# EAGLE board Segmentcontur (EAGLE 5.06)
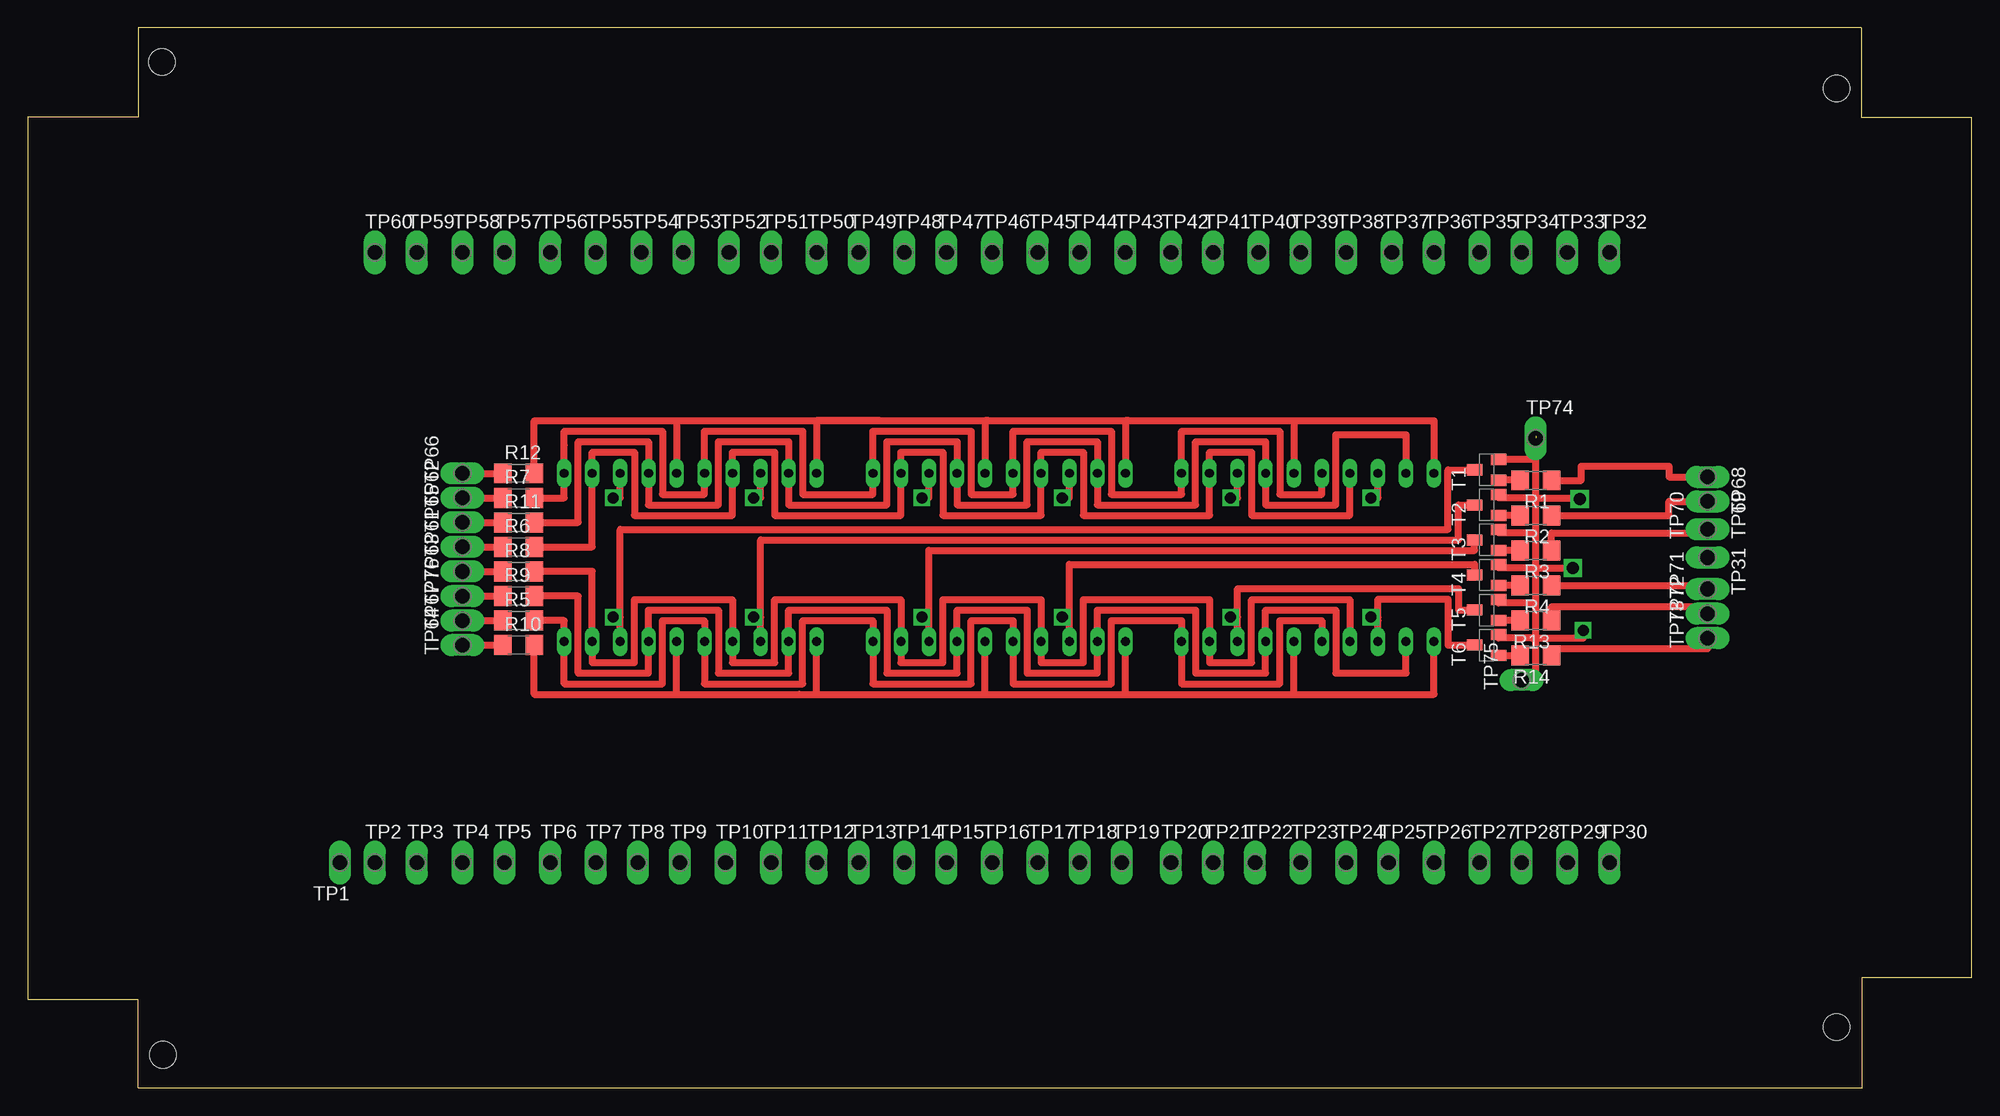
[diagram p0: board, top side]
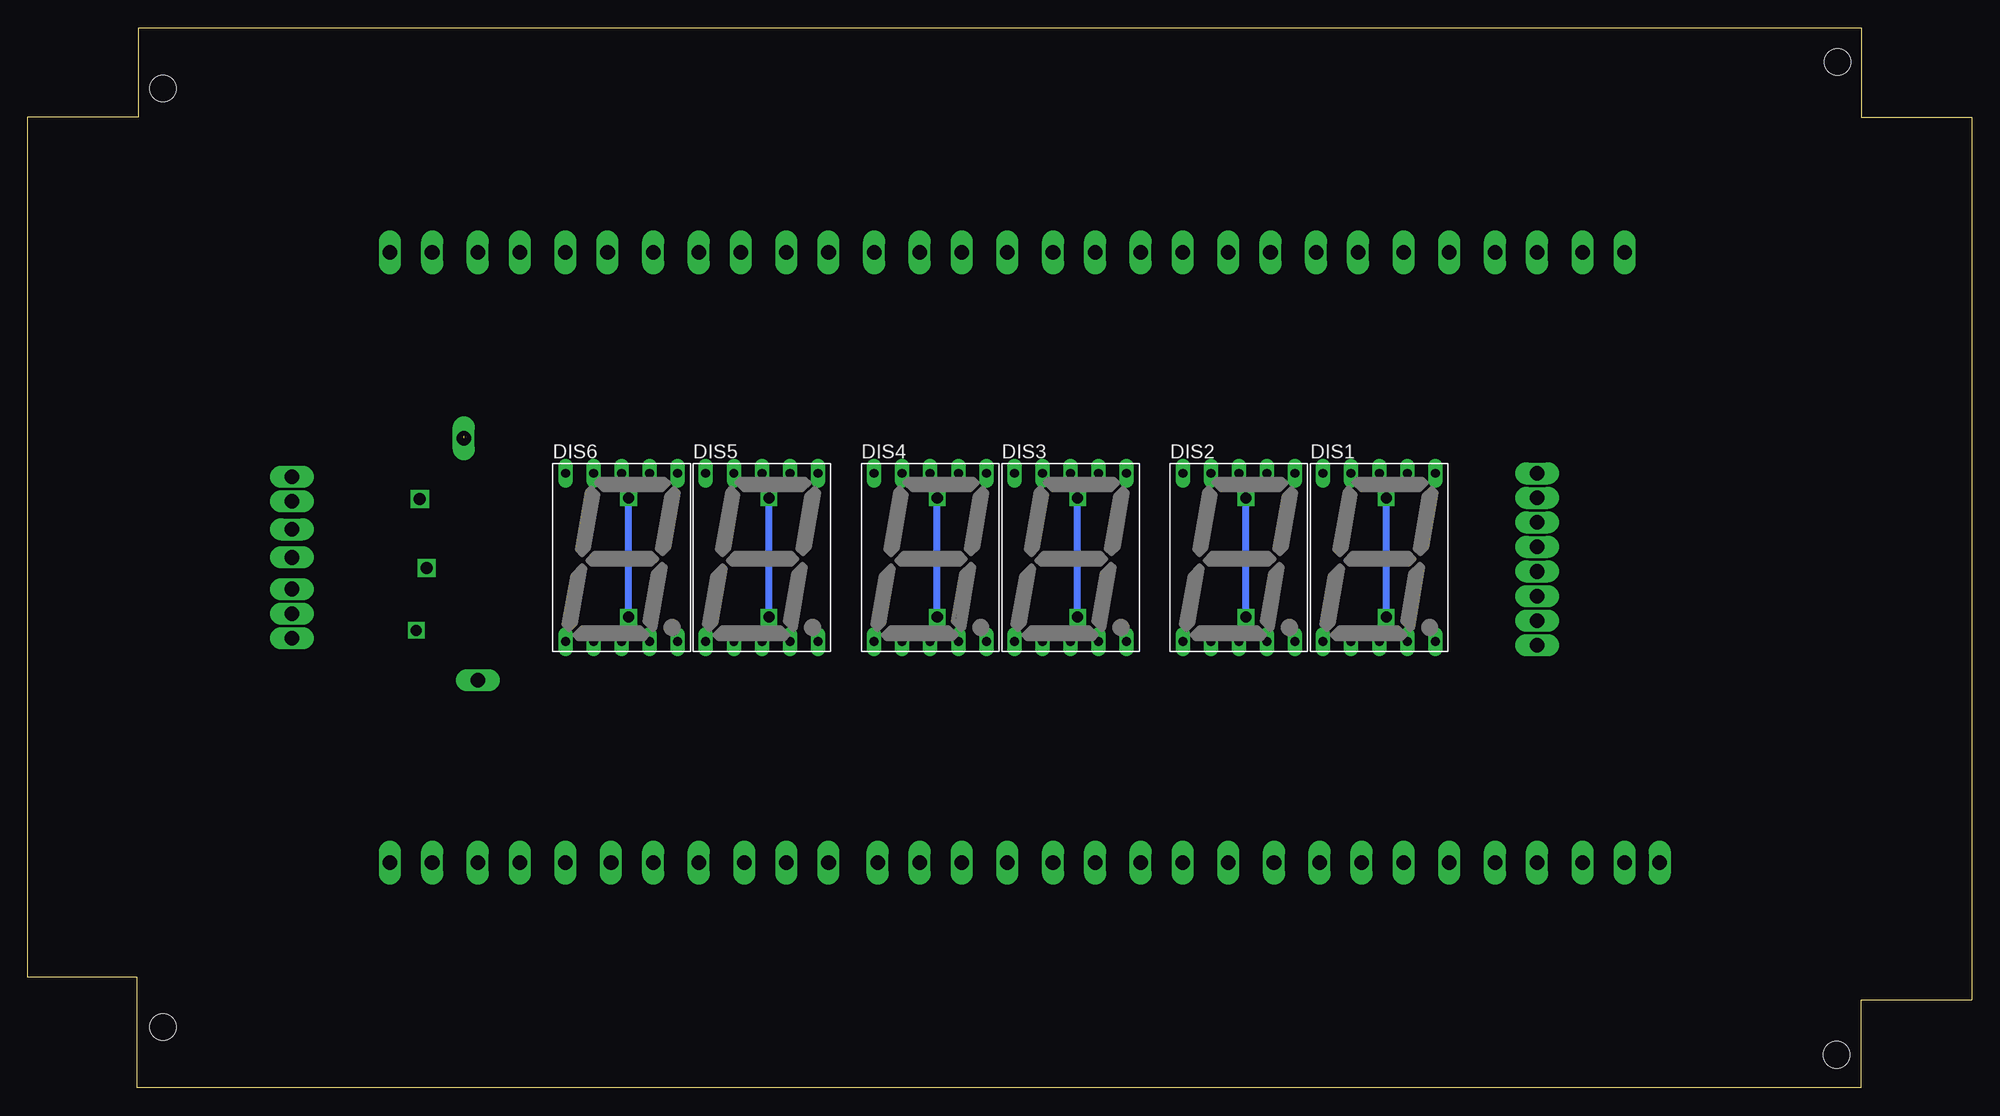
[diagram p1: board, bottom side, seen from below]

Size 176 x 96 mm. Coordinates in mm from the lower left corner, seen from the top.
Outline: 10,0 166.1,0 166.1,10 176,10 176,87.9 166,87.9 166,96 10,96 10,87.9 0,87.9 0,8 10,8 10,0
Copper layers (1*16): Top 0.035mm / dielectric 1.5mm / Bottom 0.035mm
Design rules "default": minimum track width 10mil, minimum drill 24mil, track to track 8mil, track to pad 8mil, pad to pad 8mil, via to via 8mil, smd to smd 8mil, copper to edge 40mil, drill to drill 8mil, minimum pad ring 10mil, minimum via ring 8mil, stop-mask expansion 4mil, vias tented up to drill 0mil, thermal gap 10mil
Holes 2.4 mm at 12.25,3 12.15,92.9 163.75,90.5 163.75,5.5

## Footprints (pad centres in the part's own frame; a part is rotated, then mirrored left to right if it is on the bottom)
HDSP-M = drill 0.813 long: 1 -5.08,-7.62; 2 -2.54,-7.62; 3 0,-7.62; 4 2.54,-7.62; 5 5.08,-7.62; 6 5.08,7.62; 7 2.54,7.62; 8 0,7.62; 9 -2.54,7.62; 10 -5.08,7.62
R1206 = smd 1.6 x 1.803: 1 -1.422,0; 2 1.422,0
SOT23-BEC = smd 1 x 1.4: B -0.95,-1.1; C 0,1.1; E 0.95,-1.1
P1-13Y = drill 1.321 pad 1.905 long: 1 0,0

## Placement (x,y rotation side)
DIS1  HD-H101  [HDSP-M]  53.65,48.03 0 bottom
DIS2  HD-H101  [HDSP-M]  66.35,48.03 0 bottom
DIS3  HD-H101  [HDSP-M]  81.59,48.03 0 bottom
DIS4  HD-H101  [HDSP-M]  94.29,48.03 0 bottom
DIS5  HD-H101  [HDSP-M]  109.53,48.03 0 bottom
DIS6  HD-H101  [HDSP-M]  122.23,48.03 0 bottom
R1  1k  [R1206]  136.52,55.01 180 top
R2  1k  [R1206]  136.52,51.84 180 top
R3  1k  [R1206]  136.52,48.66 180 top
R4  1k  [R1206]  136.52,45.49 180 top
R5  330  [R1206]  44.45,42.31 0 top
R6  330  [R1206]  44.45,48.98 0 top
R7  330  [R1206]  44.45,53.43 0 top
R8  330  [R1206]  44.45,46.76 0 top
R9  330  [R1206]  44.45,44.54 0 top
R10  330  [R1206]  44.45,40.09 0 top
R11  330  [R1206]  44.45,51.2 0 top
R12  330  [R1206]  44.45,55.65 0 top
R13  1k  [R1206]  136.52,42.31 180 top
R14  1k  [R1206]  136.52,39.14 180 top
T1  [SOT23-BEC]  132.07,55.97 90 top
T2  [SOT23-BEC]  132.07,52.79 90 top
T3  [SOT23-BEC]  132.07,49.62 90 top
T4  [SOT23-BEC]  132.07,46.44 90 top
T5  [SOT23-BEC]  132.07,43.27 90 top
T6  [SOT23-BEC]  132.07,40.09 90 top
TP1  PTR1PAD1-13Y  [P1-13Y]  28.25,20.41 180 top
TP2  PTR1PAD1-13Y  [P1-13Y]  31.43,20.41 0 top
TP3  PTR1PAD1-13Y  [P1-13Y]  35.24,20.41 0 top
TP4  PTR1PAD1-13Y  [P1-13Y]  39.37,20.41 0 top
TP5  PTR1PAD1-13Y  [P1-13Y]  43.17,20.41 0 top
TP6  PTR1PAD1-13Y  [P1-13Y]  47.3,20.41 0 top
TP7  PTR1PAD1-13Y  [P1-13Y]  51.43,20.41 0 top
TP8  PTR1PAD1-13Y  [P1-13Y]  55.24,20.41 0 top
TP9  PTR1PAD1-13Y  [P1-13Y]  59.05,20.41 0 top
TP10  PTR1PAD1-13Y  [P1-13Y]  63.18,20.41 0 top
TP11  PTR1PAD1-13Y  [P1-13Y]  67.31,20.41 0 top
TP12  PTR1PAD1-13Y  [P1-13Y]  71.43,20.41 0 top
TP13  PTR1PAD1-13Y  [P1-13Y]  75.24,20.41 0 top
TP14  PTR1PAD1-13Y  [P1-13Y]  79.37,20.41 0 top
TP15  PTR1PAD1-13Y  [P1-13Y]  83.18,20.41 0 top
TP16  PTR1PAD1-13Y  [P1-13Y]  87.31,20.41 0 top
TP17  PTR1PAD1-13Y  [P1-13Y]  91.44,20.41 0 top
TP18  PTR1PAD1-13Y  [P1-13Y]  95.25,20.41 0 top
TP19  PTR1PAD1-13Y  [P1-13Y]  99.06,20.41 0 top
TP20  PTR1PAD1-13Y  [P1-13Y]  103.5,20.41 0 top
TP21  PTR1PAD1-13Y  [P1-13Y]  107.31,20.41 0 top
TP22  PTR1PAD1-13Y  [P1-13Y]  111.12,20.41 0 top
TP23  PTR1PAD1-13Y  [P1-13Y]  115.25,20.41 0 top
TP24  PTR1PAD1-13Y  [P1-13Y]  119.38,20.41 0 top
TP25  PTR1PAD1-13Y  [P1-13Y]  123.19,20.41 0 top
TP26  PTR1PAD1-13Y  [P1-13Y]  127.31,20.41 0 top
TP27  PTR1PAD1-13Y  [P1-13Y]  131.44,20.41 0 top
TP28  PTR1PAD1-13Y  [P1-13Y]  135.25,20.41 0 top
TP29  PTR1PAD1-13Y  [P1-13Y]  139.38,20.41 0 top
TP30  PTR1PAD1-13Y  [P1-13Y]  143.19,20.41 0 top
TP31  PTR1PAD1-13Y  [P1-13Y]  152.08,48.03 270 top
TP32  PTR1PAD1-13Y  [P1-13Y]  143.19,75.65 0 top
TP33  PTR1PAD1-13Y  [P1-13Y]  139.38,75.65 0 top
TP34  PTR1PAD1-13Y  [P1-13Y]  135.25,75.65 0 top
TP35  PTR1PAD1-13Y  [P1-13Y]  131.44,75.65 0 top
TP36  PTR1PAD1-13Y  [P1-13Y]  127.31,75.65 0 top
TP37  PTR1PAD1-13Y  [P1-13Y]  123.5,75.65 0 top
TP38  PTR1PAD1-13Y  [P1-13Y]  119.38,75.65 0 top
TP39  PTR1PAD1-13Y  [P1-13Y]  115.25,75.65 0 top
TP40  PTR1PAD1-13Y  [P1-13Y]  111.44,75.65 0 top
TP41  PTR1PAD1-13Y  [P1-13Y]  107.31,75.65 0 top
TP42  PTR1PAD1-13Y  [P1-13Y]  103.5,75.65 0 top
TP43  PTR1PAD1-13Y  [P1-13Y]  99.37,75.65 0 top
TP44  PTR1PAD1-13Y  [P1-13Y]  95.25,75.65 0 top
TP45  PTR1PAD1-13Y  [P1-13Y]  91.44,75.65 0 top
TP46  PTR1PAD1-13Y  [P1-13Y]  87.31,75.65 0 top
TP47  PTR1PAD1-13Y  [P1-13Y]  83.18,75.65 0 top
TP48  PTR1PAD1-13Y  [P1-13Y]  79.37,75.65 0 top
TP49  PTR1PAD1-13Y  [P1-13Y]  75.24,75.65 0 top
TP50  PTR1PAD1-13Y  [P1-13Y]  71.43,75.65 0 top
TP51  PTR1PAD1-13Y  [P1-13Y]  67.31,75.65 0 top
TP52  PTR1PAD1-13Y  [P1-13Y]  63.49,75.65 0 top
TP53  PTR1PAD1-13Y  [P1-13Y]  59.37,75.65 0 top
TP54  PTR1PAD1-13Y  [P1-13Y]  55.56,75.65 0 top
TP55  PTR1PAD1-13Y  [P1-13Y]  51.43,75.65 0 top
TP56  PTR1PAD1-13Y  [P1-13Y]  47.3,75.65 0 top
TP57  PTR1PAD1-13Y  [P1-13Y]  43.17,75.65 0 top
TP58  PTR1PAD1-13Y  [P1-13Y]  39.37,75.65 0 top
TP59  PTR1PAD1-13Y  [P1-13Y]  35.24,75.65 0 top
TP60  PTR1PAD1-13Y  [P1-13Y]  31.43,75.65 0 top
TP61  PTR1PAD1-13Y  [P1-13Y]  39.37,48.98 90 top
TP62  PTR1PAD1-13Y  [P1-13Y]  39.37,53.43 90 top
TP63  PTR1PAD1-13Y  [P1-13Y]  39.37,46.76 90 top
TP64  PTR1PAD1-13Y  [P1-13Y]  39.37,40.09 90 top
TP65  PTR1PAD1-13Y  [P1-13Y]  39.37,51.2 90 top
TP66  PTR1PAD1-13Y  [P1-13Y]  39.37,55.65 90 top
TP67  PTR1PAD1-13Y  [P1-13Y]  39.37,42.31 90 top
TP68  PTR1PAD1-13Y  [P1-13Y]  152.08,55.33 270 top
TP69  PTR1PAD1-13Y  [P1-13Y]  152.08,53.11 270 top
TP70  PTR1PAD1-13Y  [P1-13Y]  152.08,50.57 90 top
TP71  PTR1PAD1-13Y  [P1-13Y]  152.08,45.17 90 top
TP72  PTR1PAD1-13Y  [P1-13Y]  152.08,42.95 90 top
TP73  PTR1PAD1-13Y  [P1-13Y]  152.08,40.73 90 top
TP74  PTR1PAD1-13Y  [P1-13Y]  136.52,58.82 0 top
TP75  PTR1PAD1-13Y  [P1-13Y]  135.25,36.91 90 top
TP76  PTR1PAD1-13Y  [P1-13Y]  39.37,44.54 90 top

## Library data of the parts
DIS1-DIS6 = display-hp
R1-R14 = rcl
T1-T6 = transistor
TP1-TP76 = testpad

## Nets
DIS0: R1.1 TP68.1
DIS1: R2.1 TP69.1
DIS2: R3.1 TP70.1
DIS3: R4.1 TP71.1
DIS4: R13.1 TP72.1
DIS5: R14.1 TP73.1
LED2: TP2.1
LED32: TP32.1
LED34: TP34.1
LED35: TP35.1
LED36: TP36.1
LED37: TP37.1
LED38: TP38.1
LED39: TP39.1
LED40: TP40.1
LED41: TP41.1
LED42: TP42.1
LED43: TP43.1
LED44: TP44.1
LED45: TP45.1
LED46: TP46.1
LED47: TP47.1
LED48: TP48.1
LED49: TP49.1
LED50: TP50.1
LED51: TP51.1
N$1: DIS1.3 DIS1.8 T1.C
N$3: DIS2.3 DIS2.8 T2.C
N$5: R4.2 T4.B
N$6: R3.2 T3.B
N$7: R2.2 T2.B
N$8: R1.2 T1.B
N$9: DIS3.3 DIS3.8 T3.C
N$10: DIS1.7 DIS2.7 DIS3.7 DIS4.7 DIS5.7 DIS6.7 R6.2
N$11: DIS1.4 DIS2.4 DIS3.4 DIS4.4 DIS5.4 DIS6.4 R8.2
N$12: DIS1.6 DIS2.6 DIS3.6 DIS4.6 DIS5.6 DIS6.6 R7.2
N$13: DIS1.2 DIS2.2 DIS3.2 DIS4.2 DIS5.2 DIS6.2 R9.2
N$14: DIS1.1 DIS2.1 DIS3.1 DIS4.1 DIS5.1 DIS6.1 R10.2
N$15: DIS1.9 DIS2.9 DIS3.9 DIS4.9 DIS5.9 DIS6.9 R11.2
N$16: DIS1.10 DIS2.10 DIS3.10 DIS4.10 DIS5.10 DIS6.10 R12.2
N$18: DIS4.3 DIS4.8 T4.C
N$19: DIS1.5 DIS2.5 DIS3.5 DIS4.5 DIS5.5 DIS6.5 R5.2
N$20: R14.2 T6.B
N$21: R13.2 T5.B
N$23: DIS5.3 DIS5.8 T5.C
N$25: DIS6.3 DIS6.8 T6.C
S$2: T1.E T2.E T3.E T4.E T5.E T6.E TP74.1
S$3: TP75.1
SEG0: R6.1 TP61.1
SEG1: R7.1 TP62.1
SEG2: R8.1 TP63.1
SEG3: R9.1 TP76.1
SEG4: R10.1 TP64.1
SEG5: R11.1 TP65.1
SEG6: R12.1 TP66.1
SEG7: R5.1 TP67.1

## Tracks (layer width: path | path; a pad name or v marks a point on that pad's centre or on a via)
DIS0
  Top 0.64: R1.1 140.65,55.01 140.65,56.28 148.58,56.28 148.58,55.33 TP68.1
DIS1
  Top 0.64: R2.1 148.58,51.84 148.58,53.11 TP69.1
DIS2
  Top 0.64: R3.1 137.94,50.25 152.08,50.25 TP70.1
DIS3
  Top 0.64: R4.1 152.08,45.49 TP71.1
DIS4
  Top 0.64: R13.1 137.94,43.58 152.08,43.58 TP72.1
DIS5
  Top 0.64: R14.1 137.94,39.77 145.09,39.77 | 145.09,39.77 149.86,39.77 | TP73.1 152.08,39.77 145.09,39.77
LED2
  Top 0.813: 31.3,20.41 TP2.1
LED32
  Top 0.813: TP32.1 143.3,75.65
LED34
  Top 0.813: TP34.1 135.3,75.65
LED35
  Top 0.813: TP35.1 131.3,75.65
LED36
  Top 0.813: TP36.1
LED37
  Top 0.813: TP37.1 123.3,75.65
LED38
  Top 0.813: TP38.1 119.3,75.65
LED39
  Top 0.813: TP39.1 115.3,75.65
LED40
  Top 0.813: TP40.1 111.3,75.65
LED41
  Top 0.813: TP41.1
LED42
  Top 0.813: TP42.1 103.3,75.65
LED43
  Top 0.813: TP43.1 99.3,75.65
LED44
  Top 0.813: TP44.1 95.3,75.65
LED45
  Top 0.813: TP45.1 91.3,75.65
LED46
  Top 0.813: TP46.1
LED47
  Top 0.813: TP47.1 83.3,75.65
LED48
  Top 0.813: TP48.1 79.3,75.65
LED49
  Top 0.813: TP49.1 75.3,75.65
LED50
  Top 0.813: TP50.1 71.3,75.65
LED51
  Top 0.813: TP51.1
N$1  (via drill 1 pad 1.42)
  Top 0.64: DIS1.8 53.65,53.43 v53.02,53.43 | v53.02,42.63 53.65,42.63 DIS1.3 53.65,50.57 128.58,50.57 128.58,55.97 T1.C
  Bottom 0.64: v53.02,42.63 v53.02,53.43
N$3  (via drill 1 pad 1.42)
  Top 0.64: DIS2.8 66.35,53.43 v65.72,53.43 | 66.35,42.63 v65.72,42.63 | DIS2.3 66.35,42.63 | T2.C 129.54,52.79 129.54,49.62 66.35,49.62 66.35,42.63
  Bottom 0.64: v65.72,42.63 v65.72,53.43
N$5
  Top 0.64: T4.B R4.2
N$6
  Top 0.64: T3.B R3.2
N$7
  Top 0.64: T2.B R2.2
N$8
  Top 0.64: R1.2 T1.B
N$9  (via drill 1 pad 1.42)
  Top 0.64: DIS3.8 81.59,53.43 v80.96,53.43 | v80.96,42.63 81.59,42.63 81.59,42 | DIS3.3 81.59,42 | T3.C 130.98,48.67 81.59,48.67 81.59,42
  Bottom 0.64: v80.96,42.63 v80.96,53.43
N$10
  Top 0.64: DIS6.7 119.69,51.84 110.8,51.84 110.8,57.55 106.99,57.55 DIS5.7 106.99,51.84 95.56,51.84 95.56,57.55 91.75,57.55 DIS4.7 91.75,51.84 82.86,51.84 82.86,57.55 79.05,57.55 DIS3.7 79.05,51.84 67.62,51.84 67.62,57.55 63.81,57.55 DIS2.7 63.81,51.84 54.92,51.84 54.92,57.55 51.11,57.55 DIS1.7 51.11,48.98 R6.2
N$11
  Top 0.64: DIS6.4 119.69,44.22 110.8,44.22 110.8,38.5 106.99,38.5 DIS5.4 106.99,44.22 95.56,44.22 95.56,38.5 91.75,38.5 DIS4.4 91.75,44.22 82.86,44.22 82.86,38.5 79.05,38.5 DIS3.4 79.05,44.22 67.62,44.22 67.62,38.5 63.81,38.5 DIS2.4 63.81,44.22 54.92,44.22 54.92,38.5 51.11,38.5 51.11,39.77 | 51.11,39.77 DIS1.4 | R8.2 51.11,46.76 51.11,39.77
N$12
  Top 0.64: DIS6.6 117.15,53.74 113.34,53.74 113.34,59.46 104.45,59.46 DIS5.6 104.45,53.74 98.1,53.74 98.1,59.46 89.21,59.46 DIS4.6 89.21,53.74 85.4,53.74 85.4,59.46 76.51,59.46 DIS3.6 76.51,53.74 70.16,53.74 70.16,59.46 61.27,59.46 DIS2.6 61.27,53.74 57.46,53.74 57.46,59.46 48.57,59.46 48.57,56.6 | 48.57,56.6 DIS1.6 48.57,53.43 R7.2 | 48.57,56.6 48.57,58.19
N$13
  Top 0.64: DIS6.2 124.77,37.55 118.42,37.55 118.42,43.27 112.07,43.27 DIS5.2 112.07,37.55 105.72,37.55 105.72,43.27 96.83,43.27 DIS4.2 96.83,37.55 90.48,37.55 90.48,43.27 84.13,43.27 DIS3.2 84.13,37.55 77.78,37.55 77.78,43.27 68.89,43.27 DIS2.2 68.89,37.55 62.54,37.55 62.54,43.27 56.19,43.27 DIS1.2 56.19,37.55 49.84,37.55 49.84,44.54 R9.2
N$14
  Top 0.64: DIS6.1 127.31,35.65 114.61,35.65 | 58.73,35.65 DIS1.1 | 114.61,35.65 DIS5.1 | 99.37,35.65 114.61,35.65 | 99.37,35.65 DIS4.1 | 86.67,35.65 99.37,35.65 | 86.67,35.65 DIS3.1 | 58.73,35.65 69.84,35.65 | 69.84,35.65 86.67,35.65 | DIS2.1 71.43,35.65 69.84,35.65 | R10.2 45.87,35.65 58.73,35.65
N$15
  Top 0.64: DIS6.9 124.77,59.14 118.42,59.14 118.42,52.79 112.07,52.79 DIS5.9 112.07,58.51 105.72,58.51 105.72,52.79 96.83,52.79 DIS4.9 96.83,58.51 90.48,58.51 90.48,52.79 84.13,52.79 DIS3.9 84.13,58.51 77.78,58.51 77.78,52.79 68.89,52.79 DIS2.9 68.89,58.51 62.54,58.51 62.54,52.79 56.19,52.79 56.19,55.01 | 56.19,55.01 DIS1.9 | 56.19,55.01 56.19,58.51 49.84,58.51 49.84,51.2 R11.2
N$16
  Top 0.64: 114.61,60.41 DIS5.10 | 114.61,60.41 127.31,60.41 DIS6.10 | DIS4.10 99.37,60.41 99.69,60.41 | 99.69,60.41 114.61,60.41 | DIS3.10 86.67,60.41 86.99,60.41 | 86.99,60.41 99.69,60.41 | 58.73,60.41 DIS1.10 | 58.73,60.41 77.15,60.41 | 77.15,60.41 86.99,60.41 | DIS2.10 71.43,60.41 77.15,60.41 | R12.2 45.87,60.41 58.73,60.41
N$18  (via drill 1 pad 1.42)
  Top 0.64: DIS4.8 94.29,53.43 v93.66,53.43 | 94.29,42.63 v93.66,42.63 | DIS4.3 94.29,42.63 | T4.C 130.98,47.4 94.29,47.4 94.29,42.63
  Bottom 0.64: v93.66,42.63 v93.66,53.43
N$19
  Top 0.64: DIS6.5 117.15,42.31 113.34,42.31 113.34,36.6 104.45,36.6 DIS5.5 104.45,42.31 98.1,42.31 98.1,36.6 89.21,36.6 DIS4.5 89.21,42.31 85.4,42.31 85.4,36.6 76.51,36.6 DIS3.5 76.51,42.31 70.16,42.31 70.16,36.6 61.27,36.6 DIS2.5 61.27,42.31 57.46,42.31 57.46,36.6 48.57,36.6 DIS1.5 48.57,42.31 R5.2
N$20
  Top 0.64: T6.B R14.2
N$21
  Top 0.64: T5.B R13.2
N$23  (via drill 1 pad 1.42)
  Top 0.64: DIS5.8 109.53,53.43 v108.9,53.43 | v108.9,42.63 109.53,42.63 109.53,41.68 | DIS5.3 109.53,41.68 | T5.C 129.54,43.27 129.54,45.2 109.53,45.2 109.53,41.68
  Bottom 0.64: v108.9,42.63 v108.9,53.43
N$25  (via drill 1 pad 1.42)
  Top 0.64: DIS6.8 122.23,53.43 v121.6,53.43 | v121.6,42.63 122.23,42.63 122.23,42.31 | DIS6.3 122.23,42.31 | T6.C 128.58,40.09 128.58,44.25 122.23,44.25 122.23,42.31
  Bottom 0.64: v121.6,42.63 v121.6,53.43
S$2  (via drill 1 pad 1.42, 1.1 pad 1.42)  (1 unrouted)
  Top 0.64: v140.5,53.31 140.5,53.43 136.52,53.43 | T2.E 133.17,53.43 136.52,53.43 | 136.52,56.91 T1.E | 136.52,56.91 136.52,59.01 | T3.E 133.17,50.25 136.52,50.25 | 136.52,53.43 136.52,56.91 | v139.88,47.06 136.52,47.06 136.52,47.08 | T4.E 133.17,47.08 136.52,47.08 | 136.52,50.25 136.52,53.43 | T5.E 133.17,43.9 136.52,43.9 | 136.52,47.08 136.52,50.25 | v140.81,41.44 140.81,40.73 136.13,40.73 | T6.E 133.17,40.73 136.13,40.73 | 136.52,43.9 136.52,47.08 | 136.52,40.73 136.52,43.9 | 136.52,40.73 136.13,40.73 | 136.52,37.23 136.52,40.73
S$3
  Top 0.64: 136.76,37.05 135.3,37.05 135.3,36.75 135.25,36.75 TP75.1
SEG0
  Top 0.64: TP61.1 R6.1
SEG1
  Top 0.64: TP62.1 R7.1
SEG2
  Top 0.64: TP63.1 R8.1
SEG3
  Top 0.64: TP76.1 R9.1
SEG4
  Top 0.64: TP64.1 R10.1
SEG5
  Top 0.64: TP65.1 R11.1
SEG6
  Top 0.64: TP66.1 R12.1
SEG7
  Top 0.64: TP67.1 R5.1